# Altium PCB PCB1.PcbDoc
Units mm, origin at the board's own origin, x right, y up, seen from the top; angles counter-clockwise.
Board outline 125.35 x 80.26 mm, 2 copper layers (Top Layer, Bottom Layer); 57 components, 46 nets, 187 pads, 20 vias.
Unrouted connection lines stored in the file: 2.
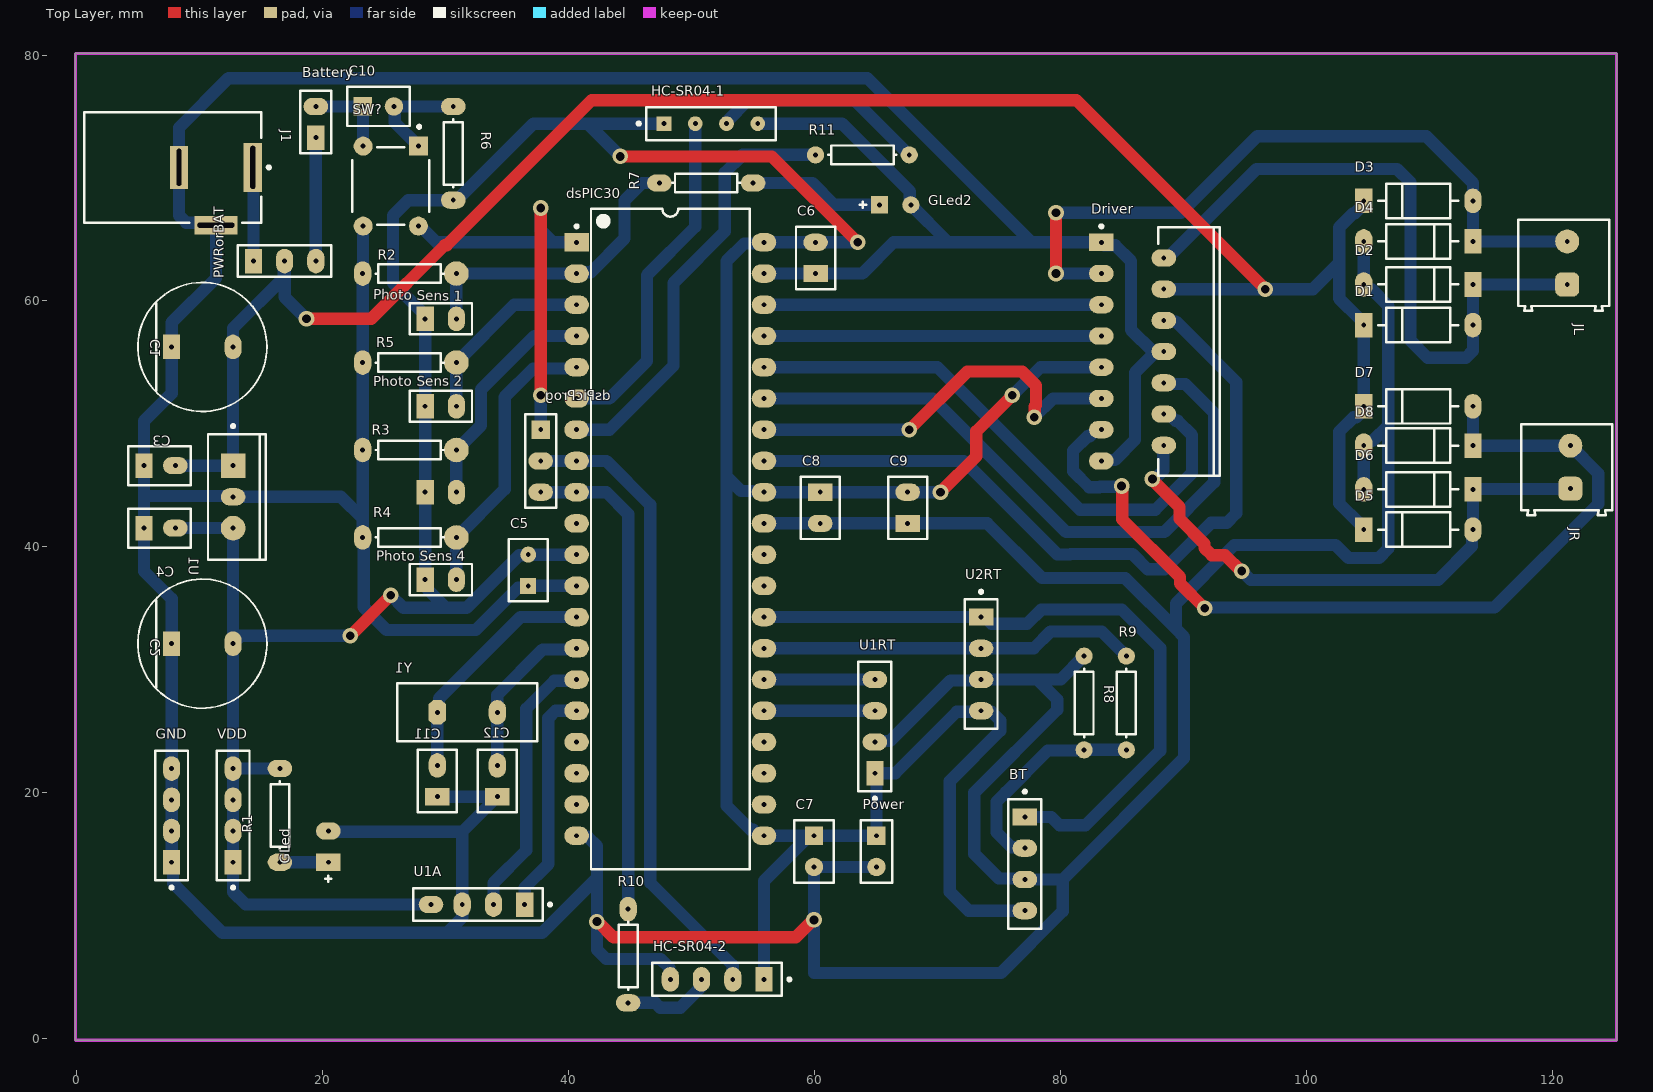
[diagram p0: Top Layer view]
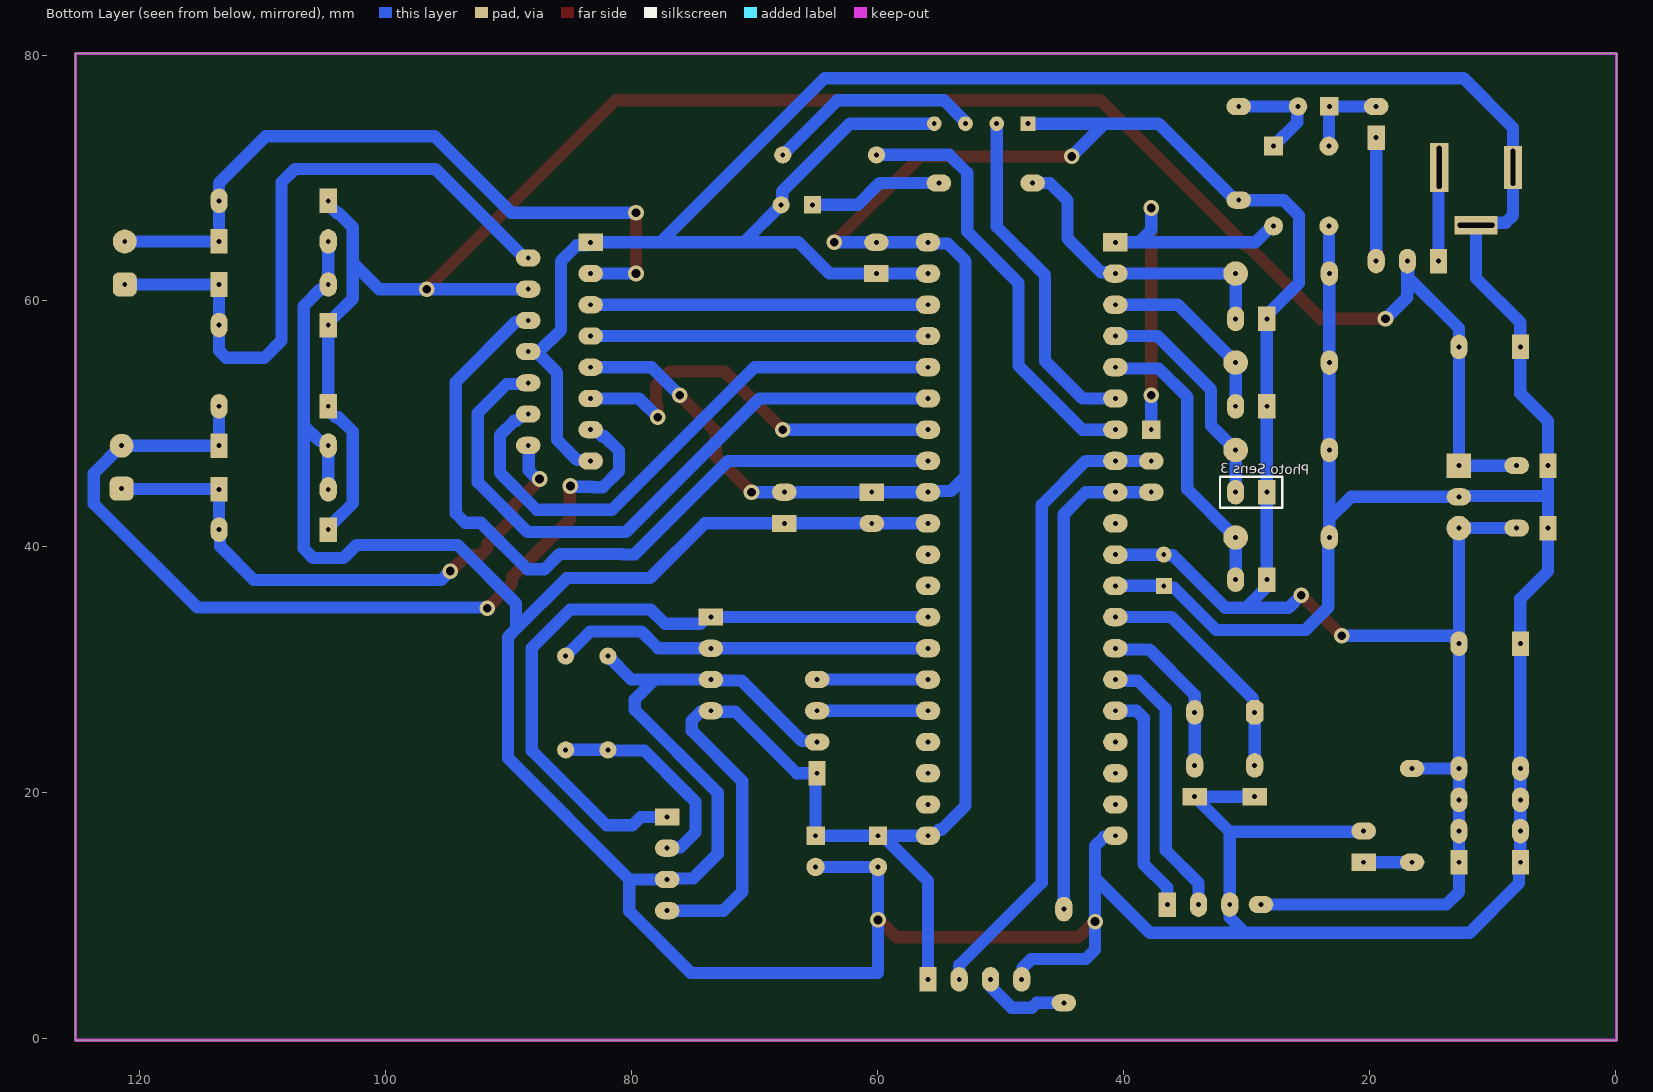
[diagram p1: Bottom Layer view, seen from below]

## Layer stack, top to bottom
Top Solder: solder mask 0.0102, Solder Resist, Dk 3.5
Top Layer: signal copper 0.0356
Dielectric 1: dielectric 0.32, FR-4, Dk 4.8
Bottom Layer: signal copper 0.0356
Bottom Solder: solder mask 0.0102, Solder Resist, Dk 3.5

## Board outline
-0.127,-0.127 -0.127,80.137 125.222,80.137 125.222,-0.127

## Design rules (kind name [scope] priority, off if disabled: settings)
Clearance [All] p1: gap=0.8 ignorepadtopadclearanceinfootprint=FALSE
PolygonConnect [All] p1: connectstyle=Relief reliefconductorwidth=0.254 reliefentries=4 polygonreliefangle="90 Angle" airgapwidth=0.254
RoutingVias [All] p1: holewidth=0.711 width=1.27 viastyle="Through Hole" minholewidth=0.711 minwidth=1.27 maxholewidth=0.711 maxwidth=1.27
SolderMaskExpansion [All] p1: expansion=0.102 istentingtop=FALSE
Width [All] p1: maxlimit=1 minlimit=1 preferedwidth=1
30 further rules are at their usual default settings.

## Components (designator, comment, footprint, x,y, rotation, side; value= is the part's Value field where it differs from the comment)
Battery "Header 2" HDR1X2#1 19.431,73.279 r90 top
BT "SS-104-G-2" FP-SS-104-G-2-MFG#1 77.089,14.224 r270 top
C1 "EEUHD1H471B" FP-RAD-TH-D_10_0_5-L_20_2-MFG 10.2,56.261 r0 top
C2 "EEUHD1H471B" FP-RAD-TH-D_10_0_5-L_20_2-MFG 10.2,32.131 r0 top
C3 "C320C104K5R5TA" CAPR51-254-508X318X736#1 6.731,46.609 r0 top
C4 "C320C104K5R5TA" CAPR51-254-508X318X736#1 6.731,41.529 r0 top
C5 "C320C104K5R5TA" CAPR51-254-508X318X736#2 36.703,38.1 r90 top
C6 "C320C104K5R5TA" CAPR51-254-508X318X736#3 60.071,63.5 r90 top
C7 "C320C104K5R5TA" CAPR51-254-508X318X736#4 59.944,15.24 r270 top
C8 "C320C104K5R5TA" CAPR51-254-508X318X736#3 60.452,43.18 r270 top
C9 "C320C104K5R5TA" CAPR51-254-508X318X736#3 67.564,43.18 r90 top
C10 "C320C104K5R5TA" CAPR51-254-508X318X736#4 24.511,75.819 r0 top
C11 "C320C104K5R5TA" CAPR51-254-508X318X736#1 29.31,20.955 r90 top
C12 "C320C104K5R5TA" CAPR51-254-508X318X736#1 34.19,20.955 r90 top
D1 "1N4007" FP-1N4007-MFG 109.093,58.039 r0 top value=15pF
D2 "1N4007" FP-1N4007-MFG 109.093,61.341 r180 top value=15pF
D3 "1N4007" FP-1N4007-MFG 109.093,68.143 r0 top value=15pF
D4 "1N4007" FP-1N4007-MFG 109.093,64.841 r180 top value=15pF
D5 "1N4007" FP-1N4007-MFG 109.093,41.402 r0 top value=15pF
D6 "1N4007" FP-1N4007-MFG 109.093,44.676 r180 top value=15pF
D7 "1N4007" FP-1N4007-MFG 109.093,51.435 r0 top value=15pF
D8 "1N4007" FP-1N4007-MFG 109.093,48.232 r180 top value=15pF
Driver "L298N" STM-FM-15 85.852,55.88 r0 top
dsPIC30 "DSPIC30F4013-20E/P" PDIP600-P40 48.26,40.64 r0 top
dsPicProg "Header 3" HDR1X3#1 37.719,49.53 r270 top
GLed "LTL-1CHG" LTST-LTL-1CHG-2#1 20.447,15.621 r90 top
GLed2 "LTL-1CHG" LTST-LTL-1CHG-2#2 66.548,67.818 r0 top
GND "SS-104-G-2" FP-SS-104-G-2-MFG#2 7.7,18.161 r90 top
HC-SR04-1 "SS-104-G-2" FP-SS-104-G-2-MFG#3 51.562,74.422 r0 top
HC-SR04-2 "SS-104-G-2" FP-SS-104-G-2-MFG#1 52.07,4.826 r180 top
J1 "PJ-002A" CUI-PJ-002A_V 11.303,70.866 r180 top
JL "691214110002" 691214110002 120.904,63.091 r90 top
JR "691214110002" 691214110002 121.158,46.482 r90 top
"Photo Sens 1" "Header 2" HDR1X2#2 28.321,58.547 r0 top
"Photo Sens 2" "Header 2" HDR1X2#2 28.321,51.435 r0 top
"Photo Sens 3" "Header 2" HDR1X2#2 28.321,44.45 r0 bottom
"Photo Sens 4" "Header 2" HDR1X2#2 28.321,37.338 r0 top
Power "Header 2" HDR1X2#3 65.024,16.51 r270 top
PWRorBAT "Header 3" HDR1X3#2 14.351,63.246 r0 top
R1 "Res1" AXIAL-0.3#1 16.51,18.161 r90 top value=220
R2 "Res1" AXIAL-0.3#2 27.051,62.23 r0 top value=220
R3 "Res1" AXIAL-0.3#2 27.051,47.879 r0 top value=220
R4 "Res1" AXIAL-0.3#3 27.051,40.767 r180 top value=220
R5 "Res1" AXIAL-0.3#3 27.051,54.991 r180 top value=220
R6 "Res1" AXIAL-0.3#1 30.607,72.009 r270 top value=10k
R7 "Res1" AXIAL-0.3#4 51.181,69.596 r180 top value=220
R8 "Res1" AXIAL-0.3#5 81.915,27.305 r90 top value=10k
R9 "Res1" AXIAL-0.3#5 85.344,27.305 r90 top value=4.7k
R10 "Res1" AXIAL-0.3#6 44.831,6.731 r270 top value=220
R11 "Res1" AXIAL-0.3#5 63.881,71.882 r0 top value=220
SW? "2-1825910-7" FP-2-1825910-7-MFG 25.527,69.342 r0 top
U1 "LM7805CT" FAIR-TO-220-3 12.7,44.069 r0 top
U1A "SS-104-G-2" FP-SS-104-G-2-MFG#4 32.605,10.911 r180 top
U1RT "SS-104-G-2" FP-SS-104-G-2-MFG#5 64.897,25.4 r90 top
U2RT "SS-104-G-2" FP-SS-104-G-2-MFG#1 73.533,30.48 r270 top
VDD "SS-104-G-2" FP-SS-104-G-2-MFG#2 12.7,18.161 r90 top
Y1 "ECS-100-18-1" HC-49U 31.75,26.543 r0 top

## Footprints (in the part's own frame and the unit in brackets; to place one, negate y for a bottom-side part, rotate by r counter-clockwise, add the part's x,y. Pads: shape width x height; smd on the part's side, far side on the other; paste and mask are expansions set on the pad)
691214110002 [mm] "3.50 mm Horizontal Entry Modular, 2p"
  rrect50% 1.95x1.95 hole 0.4: 1(-1.75,-0.3)
  round 1.95 hole 0.4: 2(1.75,-0.3)
  silkscreen extent -3.9,-3.7 3.5,3.7, body extent -3.95,-3.7 3.5,3.7, height 8.55
AXIAL-0.3#1 [mm] "Axial Device, Thru-Hole; 2 Leads; 0.3 in Pin Spacing"
  oval 1.4x2 hole 0.4: 1(-3.81,0) 2(3.81,0)
  silkscreen extent -2.77,-0.76 2.77,0.76
AXIAL-0.3#2 [mm] "Axial Device, Thru-Hole; 2 Leads; 0.3 in Pin Spacing"
  oval 1.4x2 hole 0.4: 1(-3.81,0)
  round 2 hole 0.4: 2(3.81,0)
  silkscreen extent -2.77,-0.76 2.77,0.76
AXIAL-0.3#3 [mm] "Axial Device, Thru-Hole; 2 Leads; 0.3 in Pin Spacing"
  round 2 hole 0.4: 1(-3.81,0)
  oval 1.4x2 hole 0.4: 2(3.81,0)
  silkscreen extent -2.77,-0.76 2.77,0.76
AXIAL-0.3#4 [mm] "Axial Device, Thru-Hole; 2 Leads; 0.3 in Pin Spacing"
  oval 2x1.4 hole 0.4: 1(-3.81,0) 2(3.81,0)
  silkscreen extent -2.77,-0.76 2.77,0.76
AXIAL-0.3#5 [mm] "Axial Device, Thru-Hole; 2 Leads; 0.3 in Pin Spacing"
  round 1.4 hole 0.4: 1(-3.81,0) 2(3.81,0)
  silkscreen extent -2.77,-0.76 2.77,0.76
AXIAL-0.3#6 [mm] "Axial Device, Thru-Hole; 2 Leads; 0.3 in Pin Spacing"
  oval 2x1.4 hole 0.4: 1(-3.81,0)
  oval 1.4x2 hole 0.4: 2(3.81,0)
  silkscreen extent -2.77,-0.76 2.77,0.76
CAPR51-254-508X318X736#1 [mm] "THD, 2-Leads, Body 5.08x3.18mm"
  rect 1.4x2 hole 0.4: 1(-1.27,0)
  oval 2x1.4 hole 0.4: 2(1.27,0)
  silkscreen extent -2.54,-1.59 2.54,1.59, body extent -2.54,-1.59 2.54,1.59, height 7.36
CAPR51-254-508X318X736#2 [mm] "THD, 2-Leads, Body 5.08x3.18mm"
  rect 1.3x1.3 hole 0.4: 1(-1.27,0)
  round 1.3 hole 0.4: 2(1.27,0)
  silkscreen extent -2.54,-1.59 2.54,1.59, body extent -2.54,-1.59 2.54,1.59, height 7.36
CAPR51-254-508X318X736#3 [mm] "THD, 2-Leads, Body 5.08x3.18mm"
  rect 1.4x2 hole 0.4: 1(-1.27,0)
  oval 1.4x2 hole 0.4: 2(1.27,0)
  silkscreen extent -2.54,-1.59 2.54,1.59, body extent -2.54,-1.59 2.54,1.59, height 7.36
CAPR51-254-508X318X736#4 [mm] "THD, 2-Leads, Body 5.08x3.18mm"
  rect 1.5x1.5 hole 0.4: 1(-1.27,0)
  round 1.5 hole 0.4: 2(1.27,0)
  silkscreen extent -2.54,-1.59 2.54,1.59, body extent -2.54,-1.59 2.54,1.59, height 7.36
CUI-PJ-002A_V [mm] "THD, 3-Leads, Body 14.4x9mm, Height 11mm"
  rect 1.5x4 hole 0.4 slot 3.5 at 90 deg: 1(-3,0)
  rect 1.5x3.5 hole 0.4 slot 3 at 90 deg: 2(3,0)
  rect 3.5x1.5 hole 0.4 slot 3 at 0 deg: 3(0,4.7)
  silkscreen extent -4.43,-4.5 10.7,4.5, body extent -3.7,-4.5 10.7,4.9, height 11
FAIR-TO-220-3 [mm] "FM, 3-Leads, Body 10.2x4.7mm, Pitch 2.54mm"
  rect 2x2 hole 0.4: 1(0,2.54)
  oval 2x1.4 hole 0.4: 2(0,0)
  round 2 hole 0.4: 3(0,-2.54)
  silkscreen extent -2.04,-5.1 2.66,5.87, body extent -2.04,-5.1 2.66,5.1, height 18.95
FP-1N4007-MFG [mm]
  rect 1.4x2 hole 0.4 paste-2539.97 mask+0: 1(-4.44,0)
  oval 1.4x2 hole 0.4 paste-2539.97 mask+0: 2(4.44,0)
  silkscreen extent -3.26,-1.4 3.26,1.4, body extent -5.32,-1.5 5.32,1.5, height 0.25
FP-2-1825910-7-MFG [mm]
  rect 1.54x1.54 hole 0.4 paste-2539.97 mask+0: 1(2.25,3.25)
  round 1.54 hole 0.4 paste-2539.97 mask+0: 2(2.25,-3.25) 3(-2.25,3.25) 4(-2.25,-3.25)
  silkscreen extent -3.15,-3.15 3.15,4.95, body extent -3.24,-4.12 3.24,4.12, height 0.25
FP-RAD-TH-D_10_0_5-L_20_2-MFG [mm]
  rect 1.4x2 hole 0.4 paste-2539.97 mask+0: 1(-2.5,0)
  oval 1.4x2 hole 0.4 paste-2539.97 mask+0: 2(2.5,0)
  silkscreen extent -5.25,-5.25 5.25,5.25, body extent -5.35,-5.35 5.35,5.35, height 0.25
FP-SS-104-G-2-MFG#1 [mm]
  rect 1.4x2 hole 0.4 paste-2539.97 mask+0: 1(-3.81,0)
  oval 1.4x2 hole 0.4 paste-2539.97 mask+0: 2(-1.27,0) 3(1.27,0) 4(3.81,0)
  silkscreen extent -5.99,-1.34 5.27,1.34, body extent -5.37,-1.44 5.37,1.44, height 0.25
FP-SS-104-G-2-MFG#2 [mm]
  rect 2x1.4 hole 0.4 paste-2539.97 mask+0: 1(-3.81,0)
  oval 2x1.4 hole 0.4 paste-2539.97 mask+0: 2(-1.27,0) 3(1.27,0) 4(3.81,0)
  silkscreen extent -5.99,-1.34 5.27,1.34, body extent -5.37,-1.44 5.37,1.44, height 0.25
FP-SS-104-G-2-MFG#3 [mm]
  rect 1.2x1.2 hole 0.4 paste-2539.97 mask+0: 1(-3.81,0)
  round 1.2 hole 0.4 paste-2539.97 mask+0: 2(-1.27,0) 3(1.27,0) 4(3.81,0)
  silkscreen extent -5.99,-1.34 5.27,1.34, body extent -5.37,-1.44 5.37,1.44, height 0.25
FP-SS-104-G-2-MFG#4 [mm]
  rect 1.4x2 hole 0.4 paste-2539.97 mask+0: 1(-3.81,0)
  oval 1.4x2 hole 0.4 paste-2539.97 mask+0: 2(-1.27,0) 3(1.27,0)
  oval 2x1.4 hole 0.4 paste-2539.97 mask+0: 4(3.81,0)
  silkscreen extent -6,-1.34 5.27,1.34, body extent -5.37,-1.44 5.37,1.44, height 0.25
FP-SS-104-G-2-MFG#5 [mm]
  rect 2x1.4 hole 0.4 paste-2539.97 mask+0: 1(-3.81,0)
  oval 1.4x2 hole 0.4 paste-2539.97 mask+0: 2(-1.27,0) 3(1.27,0) 4(3.81,0)
  silkscreen extent -5.99,-1.34 5.27,1.34, body extent -5.37,-1.44 5.37,1.44, height 0.25
HC-49U [mm] "Quartz Crystal, Thru-Hole; 2 Leads; Body 11.35 x 4.65 x 13.46 mm (LxWxH max)"
  oct 1.4x2 hole 0.4: 1(-2.44,0)
  oval 1.4x2 hole 0.4: 2(2.44,0)
  silkscreen extent -5.7,-2.35 5.7,2.35
HDR1X2#1 [mm] "Connector; Header; 2 Position"
  rect 2x1.4 hole 0.4: 1(0,0)
  oval 1.4x2 hole 0.4: 2(2.54,0)
  silkscreen extent -1.27,-1.27 3.81,1.27
HDR1X2#2 [mm] "Connector; Header; 2 Position"
  rect 1.4x2 hole 0.4: 1(0,0)
  oval 1.4x2 hole 0.4: 2(2.54,0)
  silkscreen extent -1.27,-1.27 3.81,1.27
HDR1X2#3 [mm] "Connector; Header; 2 Position"
  rect 1.5x1.5 hole 0.4: 1(0,0)
  round 1.5 hole 0.4: 2(2.54,0)
  silkscreen extent -1.27,-1.27 3.81,1.27
HDR1X3#1 [mm] "Connector; Header; 3 Position"
  rect 1.5x1.5 hole 0.4: 1(0,0)
  oval 1.4x2 hole 0.4: 2(2.54,0) 3(5.08,0)
  silkscreen extent -1.27,-1.27 6.35,1.27
HDR1X3#2 [mm] "Connector; Header; 3 Position"
  rect 1.4x2 hole 0.4: 1(0,0)
  oval 1.4x2 hole 0.4: 2(2.54,0) 3(5.08,0)
  silkscreen extent -1.27,-1.27 6.35,1.27
LTST-LTL-1CHG-2#1 [mm] "TH, 2-Leads, Dia 3.8mm"
  rect 1.4x2 hole 0.4: 1(-1.27,0)
  oval 1.4x2 hole 0.4: 2(1.27,0)
  silkscreen extent -2.87,-0.25 -2.37,0.25, body extent -1.9,-1.9 1.9,1.9, height 6.5
LTST-LTL-1CHG-2#2 [mm] "TH, 2-Leads, Dia 3.8mm"
  rect 1.4x1.4 hole 0.4: 1(-1.27,0)
  round 1.4 hole 0.4: 2(1.27,0)
  silkscreen extent -2.87,-0.25 -2.37,0.25, body extent -1.9,-1.9 1.9,1.9, height 6.5
PDIP600-P40 [mm] "DIP, 40-Leads, Row Spacing 15.24mm, Pitch 2.54mm, Body 51.8x13.5mm"
  rect 2x1.5 hole 0.4: 1(-7.62,24.13)
  oval 2x1.5 hole 0.4: 2(-7.62,21.59) 3(-7.62,19.05) 4(-7.62,16.51) 5(-7.62,13.97) 6(-7.62,11.43) 7(-7.62,8.89) 8(-7.62,6.35) 9(-7.62,3.81) 10(-7.62,1.27) 11(-7.62,-1.27) 12(-7.62,-3.81) 13(-7.62,-6.35) 14(-7.62,-8.89) 15(-7.62,-11.43) 16(-7.62,-13.97) 17(-7.62,-16.51) 18(-7.62,-19.05) 19(-7.62,-21.59) 20(-7.62,-24.13) 21(7.62,-24.13) 22(7.62,-21.59) 23(7.62,-19.05) 24(7.62,-16.51) 25(7.62,-13.97) 26(7.62,-11.43) 27(7.62,-8.89) 28(7.62,-6.35) 29(7.62,-3.81) 30(7.62,-1.27) 31(7.62,1.27) 32(7.62,3.81) 33(7.62,6.35) 34(7.62,8.89) 35(7.62,11.43) 36(7.62,13.97) 37(7.62,16.51) 38(7.62,19.05) 39(7.62,21.59) 40(7.62,24.13)
  silkscreen extent -7.74,-26.85 6.45,26.85, body extent -7.3,-26.85 7.3,26.85, height 6.35
STM-FM-15 [mm] "FM, 15-Leads, Body 20.2x5mm, Pitch 1.27mm"
  rect 2x1.4 hole 0.4: 1(-2.54,8.89)
  oval 2x1.4 hole 0.4: 2(2.54,7.62) 3(-2.54,6.35) 4(2.54,5.08) 5(-2.54,3.81) 6(2.54,2.54) 7(-2.54,1.27) 8(2.54,0) 9(-2.54,-1.27) 10(2.54,-2.54) 11(-2.54,-3.81) 12(2.54,-5.08) 13(-2.54,-6.35) 14(2.54,-7.62) 15(-2.54,-8.89)
  silkscreen extent -2.66,-10.1 7.09,10.31, body extent -2.8,-10.1 7.09,10.1, height 21

## Part data
Battery "Photo Sens 1" "Photo Sens 2" "Photo Sens 3" "Photo Sens 4" Power: "Header, 2-Pin", LatestRevisionDate=17-Jul-2002, LatestRevisionNote="Re-released for DXP Platform.", Publisher="Altium Limited"
BT GND HC-SR04-1 HC-SR04-2 U1A U1RT U2RT VDD: library part CMP-02766-001709-1, "CONN RCPT 4POS 0.1 GOLD PCB", Color=Black, Contact Resistance=10mR, Max Current Rating=1A, Max Operating Temperature=125°C, Min Operating Temperature=-55°C, Package Quantity=1, Connector Type=Receptacle, Contact Material=Copper, Contact Plating=Gold, Depth=2.54mm, Gender=Female, Housing Color=Black, Housing Material=Polyester, Lead Free="Lead Free", Length=10.16mm, Mount="Through Hole", Number Of Contacts=4, Number of Positions=4, Number Of Rows=1, Orientation=Straight, Packaging=Bulk, Pitch=2.54mm, Radiation Hardening=No, RoHS Compliant=Yes, Series=SS, Termination=Solder, Width=2.54mm
C1 C2: library part CMP-05427-002121-1, "Aluminum Electrolytic Capacitors (Radial Lead Type) AEC-Q200 Qualified 470uF ±20% 50V"
C3 C4 C5 C6 C7 C8 C9 C10 C11 C12: library part CMP-1664-00004-1, "Radial Leaded Multilayer Ceramic Capacitor, 0.1 uF, +/- 10%, 50 V, -55 to 125 degC, 2-Pin THD, RoHS, Tape and Reel", Case\Package=SOT-23-5, Dropout Voltage="260 mV", Max Input Voltage="8 V", Max Operating Temperature="85 degC", Max Power Dissipation="250 mW", Min Operating Temperature="-40 degC", Output Current="150 mA", Output Voltage="5 V", Package Quantity=3000, ComponentLink1Description="Manufacturer URL", ComponentLink1URL=http://www.kemet.com/, ComponentLink2Description=Datasheet, ComponentLink2URL=http://www.kemet.com/docfinder?Partnumber=C320C104K5R5TA, DatasheetVersion=Dec-15, Height="1.3 mm", Length="3 mm", Mount="Surface Mount", Outputs=1, PackageDescription="2-Pin Through Hole Device, Body 5.08 x 3.18 mm, Pitch 2.54 mm", PackageReference=CAPR51-254-508X318X736, Packaging="Tape and Reel", Pins=5, Radiation Hardening=No, RoHSCompliant=true, Width="1.8 mm"
D1 D2 D3 D4 D5 D6 D7 D8: library part CMP-123542-000001-1, "Rectifier diode 1000 V 1 A DO-41, ,", Capacitance=15pF, Forward Current=1A, Manufacturer=Diotec, Max Junction Temp=+175°C, Max Repetitive Reverse Voltage=1000V, Max Surge Forward Current=27A, Peak Reverse Current=5uA, Temperature="-50°C to +175°C", Temperature Range Low=-50°C, Automotive=No, Category=Diode, ComponentLink2Description=Datasheet, ComponentLink2URL=https://datasheet.octopart.com/1N4007-Diotec-datasheet-62346875.pdf, Device Class L1="Discrete Semiconductors", Device Class L2=Diodes, Device Class L3="Rectifier Diodes", Height=2.8mm, Ipc Land Pattern Name=DIOAD888W100L520D280, Lead Free=Yes, Manufacturer Part Number=1N4007, Octopart=https://octopart.com/1n4007-diotec-4040411, Package=1N4007, Reverse Voltage=1000V, RoHS=TRUE, Temperature Range High=+175°C
Driver: library part CMP-2000-06526-1, "Dual Full-Bridge Driver, 4.8 to 46 V, -40 to 150 degC, 15-Pin FM (MW 15L), RoHS, Tube", Driver Case Style=Multiwatt, Manufacturer=STMicroelectronics, Operating Temperature Max=130°C, Operating Temperature Min=-25°C, Output Current=2A, Output Voltage=46V, Package Description="15-Pin Flange Mount, Body 5 x 19.6 mm, Pitch 1.27 mm", Package Reference=FM-15, PartNumber=L298, Supply Voltage Max=7V, Supply Voltage Min=4.5V, Automotive Qualification Standard=-, Datasheet URL=https://datasheet.ciiva.com/15109/getdatasheetpartid-50682-15109332.pdf, Datasheet Version=01/2000, Manufacturer URL=http://www.st.com/, Motor Type=FullBridge, Mounting Technology=ThroughHole, MSL=-, No. of Outputs=4Outputs, No. of Pins=15Pins, Packaging=Each, Product Range=-, SVHC=NoSVHC(17-Dec-2015)
dsPIC30: library part DSPIC30F4013-20EP, "No Description Available", Mfr_Name=Microchip, Copyright="Copyright (C) 2024 Ultra Librarian. All rights reserved.", Manufacturer_Part_Number=DSPIC30F4013-20E/P, RefDes=RefDes, Type=DEV
dsPicProg PWRorBAT: "Header, 3-Pin", LatestRevisionDate=17-Jul-2002, LatestRevisionNote="Re-released for DXP Platform.", Publisher="Altium Limited"
GLed GLed2: library part CMP-1674-00014-1, "LITE-ON Electronic, INC, 120 mA, 100 mW, 5 V, -55 to 100 degC, 2-Pin THD, RoHS, Bulk", Case\Package=QFN, Max Operating Temperature="85 degC", Max Supply Voltage="3.6 V", Min Operating Temperature="-40 degC", Min Supply Voltage="2.5 V", Package Quantity=5000, ComponentLink1Description="Manufacturer URL", ComponentLink1URL=http://www.us.liteon.com/, ComponentLink2Description=Datasheet, ComponentLink2URL=http://datasheet.octopart.com/LTL-1CHG-Lite-On-datasheet-143841.pdf, DatasheetVersion=Mar-00, Interface=I2C, PackageDescription="2-Pin Through Hole Device, Dia 3.8 mm", PackageReference=LTL-1CHG, Packaging="Cut Tape", Pins=24, REACH SVHC="No SVHC", RoHSCompliant=true
J1: library part CMP-2000-06895-2, "Through Hole Right Angle DC Power Jack, 2.5 A, 2 mm Center Pin, 3 Position, -25 to 85 degC, RoHS, Bulk", Current Rating=2.5A, Flammability Rating=UL94V-0, Insulation Resistance=50MOhms, Manufacturer=CUIInc., Operating Temperature Range=-25Cto+85C, Package Description="3-Pin Through Hole Device, Body 14.4 x 9 mm, Height 11 mm", Voltage Rating=24V, Brand=CUI, Connector Type=DCPowerJack, Contact Gender=Male, Contact Material=Copper, Contact Plating=Nickel, Datasheet URL=http://www.cui.com/product/resource/pj-002a.pdf, Datasheet Version="Rev. 1.03, 04/2016", Factory Pack Quantity=500, Housing Material=PolybutyleneTerephthalate(PBT), Inside Contact Diameter=2mm, Manufacturer URL=http://www.cui.com/, Mounting Angle=Right, Mounting Style=ThroughHole, Mounting Technology=ThroughHole, Outside Contact Diameter=6.5mm, Package Reference=PJ-002A, Product=Jacks, Product Category=DCPowerConnectors, RoHS=True, Termination Style=ThroughHole
JL JR: library part CMP-1502-02464-2, Color="Blue, Green", Current=10A, Max Operating Temperature=105°C, Min Operating Temperature=-40°C, Voltage=300V, Contact Material=Brass, Contact Plating="Brass, Tin", Current Rating=10A, Height=8.7mm, Housing Material=Nylon, Lead Pitch=3.5mm, Length=7.4mm, Mount="Through Hole", NexarPartId=18818288, Number Of Contacts=2, Number of Levels=1, Number of Pins=2, Number of Positions Per Level=2, Number Of Rows=1, Packaging=Box, Pitch=3.5052mm, Plating="Brass, Steel", REACH SVHC=Unknown, RoHS=Compliant, Stripping Length=-6mm, Termination=Screw, Voltage Rating=300V, Width=7.9mm, Wire Gauge (Max)=24AWG, Wire Gauge (Min)=16AWG, Wire/Cable Gauge=24AWG
R1 R2 R3 R4 R5 R6 R7 R8 R9 R10 R11: "Resistor", LatestRevisionDate=17-Jul-2002, LatestRevisionNote="Re-released for DXP Platform.", PackageDescription="Axial Device, Thru-Hole; 2 Leads; 0.3 in Pin Spacing", PackageReference=AXIAL-0.3, Published=8-Jun-2000, Publisher="Altium Limited"
SW?: library part CMP-03402-000004-1, "SWITCH TACTILE SPST-NO 0.05A 24V", Contact Current Rating=50mA, Contact Resistance=100mΩ, Manufacturer="TE Connectivity", Operating Force=160gf, Temperature="-35°C to +85°C", Temperature Range High=+85°C, Temperature Range Low=-35°C, Voltage Rating Dc=24V, Automotive=No, Category=Switch, ComponentLink2Description=Datasheet, ComponentLink2URL=https://www.te.com/commerce/DocumentDelivery/DDEController?Action=showdoc&DocId=Customer+Drawing%7F1825910%7FC10%7Fpdf%7FEnglish%7FENG_CD_1825910_C10.pdf%7F2-1825910-7, Device Class L1=Electromechanical, Device Class L2=Switches, Device Class L3="Pushbutton Switches", Digikey Description="SWITCH TACTILE SPST-NO 0.05A 24V", Electromechanical Life=100000Cycles, Height=13.3mm, Lead Free=Yes, Manufacturer Part Number=2-1825910-7, Mount="Through Hole", Mouser Description="Switch Tactile OFF (ON) SPST Extended Round Button PC Pins 0.05A 24VDC 100000Cycles 1.57N Thru-Hole Loose", Octopart=https://octopart.com/2-1825910-7-te+connectivity-42270510, Package=2-1825910-7, RoHS=TRUE, Throw Configuration=SPST-NO
U1: library part CMP-2000-04938-1, "Positive Voltage Regulator, 5 V, 1 A, -40 to 125 degC, 3-Pin TO-220, RoHS, Tube", Manufacturer=FairchildSemiconductor, Maximum Input Voltage=35V, Maximum Output Current=2.2(Typ)A, Maximum Quiescent Current=8mA, Operating Temperature=-40to125degC, Output Voltage=5V, Package=3TO-220AB, Package Description="3-Pin Through Hole Device, Body 10 x 4.5 mm, Pitch 2.54 mm", Package Reference=TO-220, Typical Dropout Voltage @ Current=2@1AV, Accuracy=±4%, Category=LinearRegulator, Datasheet URL=https://datasheet.ciiva.com/26904/lm7805ct-26904988.pdf, Datasheet Version=Aug-12, Line Regulation=100mV, Load Regulation=100mV, Manufacturer URL=https://www.fairchildsemi.com/, Mounting=ThroughHole, Number of Outputs=1, Output Type=Fixed, Package URL=https://www.fairchildsemi.com/package-drawings/TO/TO220B03.pdf, Packaging=Rail/Tube, Polarity=Positive, Rad Hard=No, Type=Linear
Y1: library part ECS-10-13-1, "Crystal Oscillator", ComponentLink1Description="Manufacturer Link", ComponentLink1URL=http://www.ecsxtal.com/, ComponentLink2Description=Datasheet, ComponentLink2URL=http://www.ecsxtal.com/pdf2/HC49U.PDF, DatasheetDocument=18-Apr-2000, PackageReference=HC-49U, Published=17-Jul-2002, Publisher="Altium Limited"

## Via types
v1: diameter 1.27, hole 0.711, Top Layer to Bottom Layer, 20 vias

## Nets (pads, with @x,y where several pads share a name; then routed paths per layer and width w, separated by ;. In a path a pad name is that pad's centre, name@x,y a point inside that pad or via, vN(x,y) a via of type N, cw(c..) or ccw(c..) an arc to the next point about the centre after c; other vN are vias at no path point)
GND: Battery.2 BT.3 C1.1 C2.1 C3.1 C4.1 C5.1 C6.1 C7.2 C8.2 C9.1 C10.1 C11.1 C12.1 D2.2 D4.2 D6.2 D8.2 Driver.1 Driver.8 Driver.15 dsPIC30.12 dsPIC30.20 dsPIC30.31 dsPIC30.39 GLed2.2 GLed.2 GND.1 GND.2 GND.3 GND.4 HC-SR04-1.4 HC-SR04-2.4 J1.2 J1.3 Power.2 R2.1 R3.1 R4.2 R5.2 R8.2 SW?.3 SW?.4 U1.2 U1A.3 U1RT.2 U2RT.3 | length 596
  Top Layer w1: v1(42.291,9.525) 42.364,9.525 43.648,8.241 58.451,8.241 59.871,9.661 v1(59.944,9.661)
  Bottom Layer w1: Battery.2 C10.1 23.259,75.801 23.259,72.61 SW?.3 ; GLed.2@19.962,16.83 31.335,16.83 ; SW?.4 23.259,66.074 23.259,62.248 R2.1 R5.2 R3.1 23.241,42.291 ; C11.1 C12.1 31.335,16.83 ; 30.162,8.7 31.335,9.872 U1A.3 31.335,16.83 ; dsPIC30.20 40.736,16.414 41.551,16.414 42.291,15.674 42.291,13.081 ; dsPIC30.12 C5.1 36.553,36.68 35.877,36.68 32.435,33.238 25.182,33.238 23.318,35.102 23.318,40.69 R4.2 23.241,42.291 ; HC-SR04-2.4 48.183,4.903 48.183,5.768 47.474,6.477 43.053,6.477 42.291,7.239 v1(42.291,9.525) 42.291,13.081 ; HC-SR04-1.4 62.23,74.422 67.742,68.91 67.742,67.895 70.866,64.77 ; dsPIC30.31 C8.2 C9.1 74.041,41.91 78.486,37.465 85.251,37.465 89.378,33.338 ; dsPIC30.39 C6.1 63.881,62.23 66.421,64.77 70.866,64.77 ; U1RT.2 64.974,24.207 66.121,24.207 71.048,29.133 73.456,29.133 U2RT.3 78.105,29.21 ; Power.2@65.12,14.066 Power.2 C7.2 v1(59.944,9.661) 59.944,5.352 75.155,5.352 80.177,10.374 80.177,12.954 ; R8.2 80.01,29.21 78.105,29.21 ; Driver.15 83.395,47.073 84.411,47.073 86.049,48.711 86.049,54.172 87.68,55.803 88.315,55.803 Driver.8 ; Driver.8@87.503,55.88 85.732,57.651 85.732,63.239 84.451,64.52 83.562,64.52 Driver.1 77.631,64.77 ; D6.2 D8.2 104.653,48.424 104.838,48.609 105.365,48.609 106.653,49.897 ; D4.2 D2.2 104.653,61.149 104.838,60.964 105.279,60.964 106.653,59.59 106.653,49.897 ; 5.461,44.133 C3.1 5.461,50.24 7.7,52.479 C1.1 7.7,58.246 11.303,61.849 J1.3 11.096,66.373 8.889,66.373 8.303,66.959 8.303,74.089 12.336,78.122 64.279,78.122 77.631,64.77 ; 5.461,44.133 C4.1 5.461,38.025 7.7,35.786 C2.1 GND.4 GND.3 GND.2 GND.1 7.809,14.242 7.809,12.638 11.836,8.611 37.821,8.611 42.291,13.081 ; 5.461,44.133 12.636,44.133 U1.2 21.463,44.069 23.241,42.291 ; 70.866,64.77 77.631,64.77 ; 78.105,29.21 79.729,27.586 79.729,26.758 72.989,20.018 72.989,15.022 74.98,13.031 77.012,13.031 BT.3 80.177,12.954 ; 80.177,12.954 90.043,22.82 90.043,32.673 89.378,33.338 ; 89.378,33.338 89.378,35.403 94.129,40.154 102.363,40.154 103.415,39.102 105.891,39.102 106.653,39.864 106.653,49.897
MCLR: C10.2 dsPIC30.1 dsPicProg.1 R6.1 SW?.1 SW?.2 | length 44
  Top Layer w1: v1(37.719,52.324) v1(37.719,67.564) ; dsPIC30.1@40.14,65.02 40.39,64.77 dsPIC30.1
  Bottom Layer w1: C10.2 C10.2@25.81,75.79 ; SW?.2 27.923,66.092 29.245,64.77 38.735,64.77 ; SW?.1 25.838,74.531 25.838,75.762 C10.2@25.81,75.79 ; R6.1@30.48,75.819 25.838,75.819 C10.2@25.81,75.79 ; dsPicProg.1 v1(37.719,52.324) ; v1(37.719,67.564) 37.719,65.786 38.735,64.77 ; dsPIC30.1 38.735,64.77
NetBT_2: BT.2 R8.1 R9.1 | length 17.6
  Bottom Layer w1: BT.2 77.012,15.571 76.014,15.571 74.789,16.796 74.789,19.272 75.551,20.034 78.959,23.442 81.862,23.442 R8.1 R9.1
NetD1_2: D1.2 D2.1 Driver.2 JL.1 | length 55.3
  Bottom Layer w1: Driver.2 88.692,63.5 95.931,70.739 107.364,70.739 108.453,69.65 108.453,56.774 109.855,55.372 112.947,55.372 113.533,55.958 D1.2 D2.1 JL.1
NetD3_2: D3.2 D4.1 Driver.3 JL.2 | length 59.1
  Top Layer w1: v1(79.629,62.23) v1(79.629,67.183)
  Bottom Layer w1: v1(79.629,62.23) Driver.3 ; v1(79.629,67.183) 89.789,67.183 96.012,73.406 109.728,73.406 113.533,69.601 D3.2 D4.1 JL.2
NetD5_2: D5.2 D6.1 Driver.14 JR.1 | length 47.2
  Top Layer w1: v1(87.468,45.523) 87.468,45.45 89.67,43.248 89.67,42.283 91.705,40.248 91.705,39.917 92.304,39.319 93.379,39.319 94.668,38.03 v1(94.741,38.03)
  Bottom Layer w1: v1(87.468,45.523) 87.52,45.575 87.7,45.575 88.359,46.233 88.359,48.075 88.392,48.108 Driver.14 ; v1(94.741,38.03) 95.469,37.302 110.708,37.302 113.465,40.059 113.465,41.334 D5.2 D6.1 113.561,44.704 121.43,44.704 JR.1
NetD7_2: D7.2 D8.1 Driver.13 JR.2 | length 74.3
  Top Layer w1: v1(84.963,44.949) 85.015,44.897 85.015,42.239 89.711,37.543 89.711,37.022 v1(91.722,35.01)
  Bottom Layer w1: Driver.13 82.904,49.53 82.364,48.99 82.184,48.99 81.012,47.818 81.012,46.162 82.328,44.846 83.156,44.846 83.208,44.897 84.911,44.897 v1(84.963,44.949) ; v1(91.722,35.01) 91.774,35.062 115.291,35.062 123.733,43.504 123.733,45.96 121.461,48.232 JR.2 D8.1 D7.2
NetGLed2_1: GLed2.1 R7.1 | length 11
  Bottom Layer w1: R7.1 59.817,69.596 61.595,67.818 GLed2.1
NetGLed_1: GLed.1 R1.1 | length 3.8
  Bottom Layer w1: R1.1 GLed.1@20.32,14.351
NetHC-SR04-1_3: HC-SR04-1.3 R11.2 | length 17.6
  Bottom Layer w1: HC-SR04-1.3 52.87,74.46 52.87,74.607 54.585,76.322 63.251,76.322 R11.2
NetHC-SR04-2_3: HC-SR04-2.3 R10.2 | length 7.3
  Bottom Layer w1: R10.2@44.946,2.921 47.037,2.921 47.432,2.526 49.088,2.526 50.723,4.161 50.723,4.749 HC-SR04-2.3
OSC1: C11.2 dsPIC30.13 Y1.1 | length 19.5
  Bottom Layer w1: C11.2@29.31,22.306 C11.2 Y1.1 29.453,26.686 29.453,27.675 36.068,34.29 dsPIC30.13
PGC: dsPIC30.8 dsPicProg.2 HC-SR04-2.2 | length 51.8
  Bottom Layer w1: dsPicProg.2 dsPIC30.8 43.059,46.99 46.631,43.418 46.631,12.678 53.34,5.969 HC-SR04-2.2 HC-SR04-2.2@53.302,4.864
PGD: dsPIC30.9 dsPicProg.3 R10.1 | length 40
  Bottom Layer w1: dsPicProg.3 dsPIC30.9 43.053,44.45 44.831,42.672 R10.1
RA11: dsPIC30.17
RB0: "Photo Sens 1.2" dsPIC30.2 R2.2 R7.2 | length 25
  Bottom Layer w1: 30.861,58.547 R2.2 dsPIC30.2 40.736,62.326 41.784,62.326 44.539,65.081 44.539,68.161 45.974,69.596 R7.2
RB1: "Photo Sens 2.2" dsPIC30.3 R5.1 | length 15.5
  Bottom Layer w1: 30.924,51.498 30.861,51.435 R5.1 35.56,59.69 dsPIC30.3 dsPIC30.3@40.565,59.615
RB2: "Photo Sens 3.2" dsPIC30.4 R3.2 | length 18.8
  Bottom Layer w1: 30.861,44.45 R3.2 32.861,49.879 32.861,52.806 37.205,57.15 dsPIC30.4
RB3: "Photo Sens 4.2" dsPIC30.5 R4.1 | length 23.3
  Bottom Layer w1: 30.861,37.338 R4.1 34.782,44.688 34.782,52.181 37.115,54.514 40.544,54.514 dsPIC30.5
RB4: dsPIC30.6 HC-SR04-1.2 | length 27.9
  Bottom Layer w1: dsPIC30.6 43.301,52.07 46.355,55.124 46.355,62.103 50.292,66.04 HC-SR04-1.2
RB5: dsPIC30.7 R11.1 | length 35.4
  Bottom Layer w1: dsPIC30.7 43.307,49.53 48.514,54.737 48.514,61.468 52.691,65.645 52.691,70.424 54.149,71.882 R11.1
RB8: dsPIC30.10
RB9: Driver.5 dsPIC30.38 | length 27.4
  Bottom Layer w1: dsPIC30.38 Driver.5
RB10: Driver.7 dsPIC30.37 | length 27.4
  Bottom Layer w1: dsPIC30.37 Driver.7
RB11: Driver.12 dsPIC30.36 | length 46.9
  Bottom Layer w1: dsPIC30.36 69.977,54.61 81.573,43.014 87.696,43.014 90.692,46.01 90.692,49.088 89.52,50.26 89.34,50.26 88.8,50.8 Driver.12
RB12: Driver.10 dsPIC30.35 | length 53.5
  Bottom Layer w1: dsPIC30.35 69.596,52.07 80.452,41.214 88.441,41.214 92.492,45.265 92.492,50.891 90.139,53.244 89.071,53.244 89.051,53.263 88.469,53.263 Driver.10
RC13: dsPIC30.15 U1A.2 | length 22.1
  Bottom Layer w1: U1A.2 33.875,12.666 36.54,15.331 36.54,26.83 38.825,29.114 40.544,29.114 dsPIC30.15
RC14: dsPIC30.16 U1A.1 | length 18.5
  Bottom Layer w1: U1A.1 36.415,12.285 38.34,14.21 38.34,26.084 38.926,26.67 dsPIC30.16
RC15: C12.2 dsPIC30.14 Y1.2 | length 13.8
  Bottom Layer w1: C12.2 Y1.2 34.184,26.549 34.184,27.961 37.877,31.654 40.544,31.654 dsPIC30.14
RD0: Driver.11 dsPIC30.34 | length 33.3
  Top Layer w1: v1(67.691,49.53) 72.42,54.259 76.875,54.259 78.008,53.126 78.008,51.522 77.903,51.417 77.903,50.598 v1(77.851,50.546)
  Bottom Layer w1: dsPIC30.34 v1(67.691,49.53) ; v1(77.851,50.546) 79.375,52.07 Driver.11
RD1: Driver.6 dsPIC30.33 | length 62.6
  Bottom Layer w1: dsPIC30.33 72.13,46.99 79.738,39.382 80.773,39.382 80.805,39.414 85.848,39.414 87.079,38.183 88.464,38.183 92.235,41.954 93.515,41.954 94.292,42.731 94.292,53.409 89.377,58.324 88.488,58.324 Driver.6
RD2: dsPIC30.22
RD3: dsPIC30.19
RD8: dsPIC30.23
RD9: dsPIC30.18
RF0: dsPIC30.30
RF1: dsPIC30.29
RF2: dsPIC30.26 U1RT.4 | length 9
  Bottom Layer w1: dsPIC30.26 U1RT.4
RF3: dsPIC30.25 U1RT.3 | length 9
  Bottom Layer w1: dsPIC30.25 U1RT.3
RF4: BT.1 dsPIC30.28 U2RT.1 | length 56.4
  Bottom Layer w1: dsPIC30.28 73.833,34.29 74.373,33.75 77.271,33.75 78.436,34.915 84.973,34.915 88.106,31.782 88.106,23.429 82.032,17.355 79.916,17.355 79.237,18.034 BT.1
RF5: dsPIC30.27 R9.2 U2RT.2 | length 30.9
  Bottom Layer w1: dsPIC30.27 U2RT.2 77.817,31.75 79.182,33.115 83.344,33.115 R9.2
RF6: dsPIC30.24
Vbat: Battery.1 PWRorBAT.3 | length 10
  Bottom Layer w1: PWRorBAT.3 Battery.1
VCC: C1.2 C3.2 D1.1 D3.1 D5.1 D7.1 Driver.4 PWRorBAT.2 U1.1 | length 165.8
  Top Layer w1: v1(18.669,58.547) 23.925,58.547 29.908,64.53 30.066,64.53 41.858,76.322 81.285,76.322 v1(96.647,60.96)
  Bottom Layer w1: C3.2 U1.1 12.7,57.785 16.795,61.88 16.795,63.15 PWRorBAT.2 16.891,60.325 v1(18.669,58.547) ; Driver.4 v1(96.647,60.96) 100.522,60.96 102.653,63.091 ; D5.1 104.653,41.702 104.453,41.902 104.299,41.902 102.653,43.548 102.653,49.36 103.825,50.532 104.05,50.532 104.653,51.135 D7.1 D1.1 104.653,58.339 104.453,58.539 104.327,58.539 102.653,60.213 102.653,63.091 ; D3.1 104.653,67.843 103.951,67.141 103.825,67.141 102.653,65.969 102.653,63.091
Vdd: "Photo Sens 1.1" "Photo Sens 2.1" "Photo Sens 3.1" "Photo Sens 4.1" BT.4 C2.2 C4.2 C5.2 C6.2 C7.1 C8.1 C9.2 Driver.9 dsPIC30.11 dsPIC30.21 dsPIC30.32 dsPIC30.40 HC-SR04-1.1 HC-SR04-2.1 Power.1 R1.2 R6.2 U1.3 U1A.4 U1RT.1 U2RT.4 VDD.1 VDD.2 VDD.3 VDD.4 | length 329.4
  Top Layer w1: v1(22.225,32.766) v1(25.527,36.068) ; v1(44.196,71.755) 56.515,71.755 v1(63.5,64.77) ; v1(70.231,44.45) 73.152,47.371 73.152,49.403 v1(76.073,52.324)
  Bottom Layer w1: C4.2 U1.3 C2.2@12.7,32.323 ; C2.2@12.7,32.05 VDD.4 ; C2.2 C2.2@12.7,32.323 ; R1.2 VDD.4 ; v1(22.225,32.766) 13.335,32.766 13.077,32.508 12.885,32.508 C2.2@12.7,32.323 ; v1(25.527,36.068) 26.557,35.038 30.033,35.038 ; U1A.4 13.727,10.911 12.7,11.938 VDD.1 VDD.2 VDD.3 VDD.4 ; C5.2@36.622,39.37 36.564,39.313 35.964,39.313 31.689,35.038 30.033,35.038 ; C5.2 dsPIC30.11 ; v1(44.196,71.755) 41.529,74.422 ; HC-SR04-1.1 41.529,74.422 ; HC-SR04-2.1 55.88,12.827 59.413,16.36 59.794,16.36 C7.1 Power.1 65.024,21.463 U1RT.1 66.548,21.59 71.551,26.593 73.456,26.593 U2RT.4 73.61,26.593 74.385,26.593 75.094,25.884 75.094,25.056 70.993,20.955 70.993,11.938 72.517,10.414 BT.4 ; C7.1@59.413,16.51 dsPIC30.21 55.495,16.51 55.005,17 54.781,17 52.832,18.949 52.832,45.72 ; v1(63.5,64.77) C6.2 dsPIC30.40 55.784,64.674 54.266,64.674 52.832,63.24 52.832,45.72 ; v1(70.231,44.45) C9.2 C8.1 dsPIC30.32 55.784,44.546 54.006,44.546 52.832,45.72 ; v1(76.073,52.324) 78.359,54.61 Driver.9 ; 30.033,35.038 28.521,36.55 28.521,37.138 28.321,37.338 28.321,51.435 28.321,58.547 28.321,58.847 25.707,61.461 25.707,66.949 26.957,68.199 R6.2 30.907,68.199 37.13,74.422 41.529,74.422
Vpwr: J1.1 PWRorBAT.1 | length 7.6
  Bottom Layer w1: J1.1 14.353,70.816 14.353,63.248 PWRorBAT.1

## Keep-outs
Keep-Out Layer:
  the board outline again, w0.254